# Altium PCB PCB1.PcbDoc
Units mm, origin at the board's own origin, x right, y up, seen from the top; angles counter-clockwise.
Board outline 86 x 56 mm, 2 copper layers (Top Layer, Bottom Layer), stack 1.771 mm thick; 7 components, 53 nets, 144 pads, 50 vias.
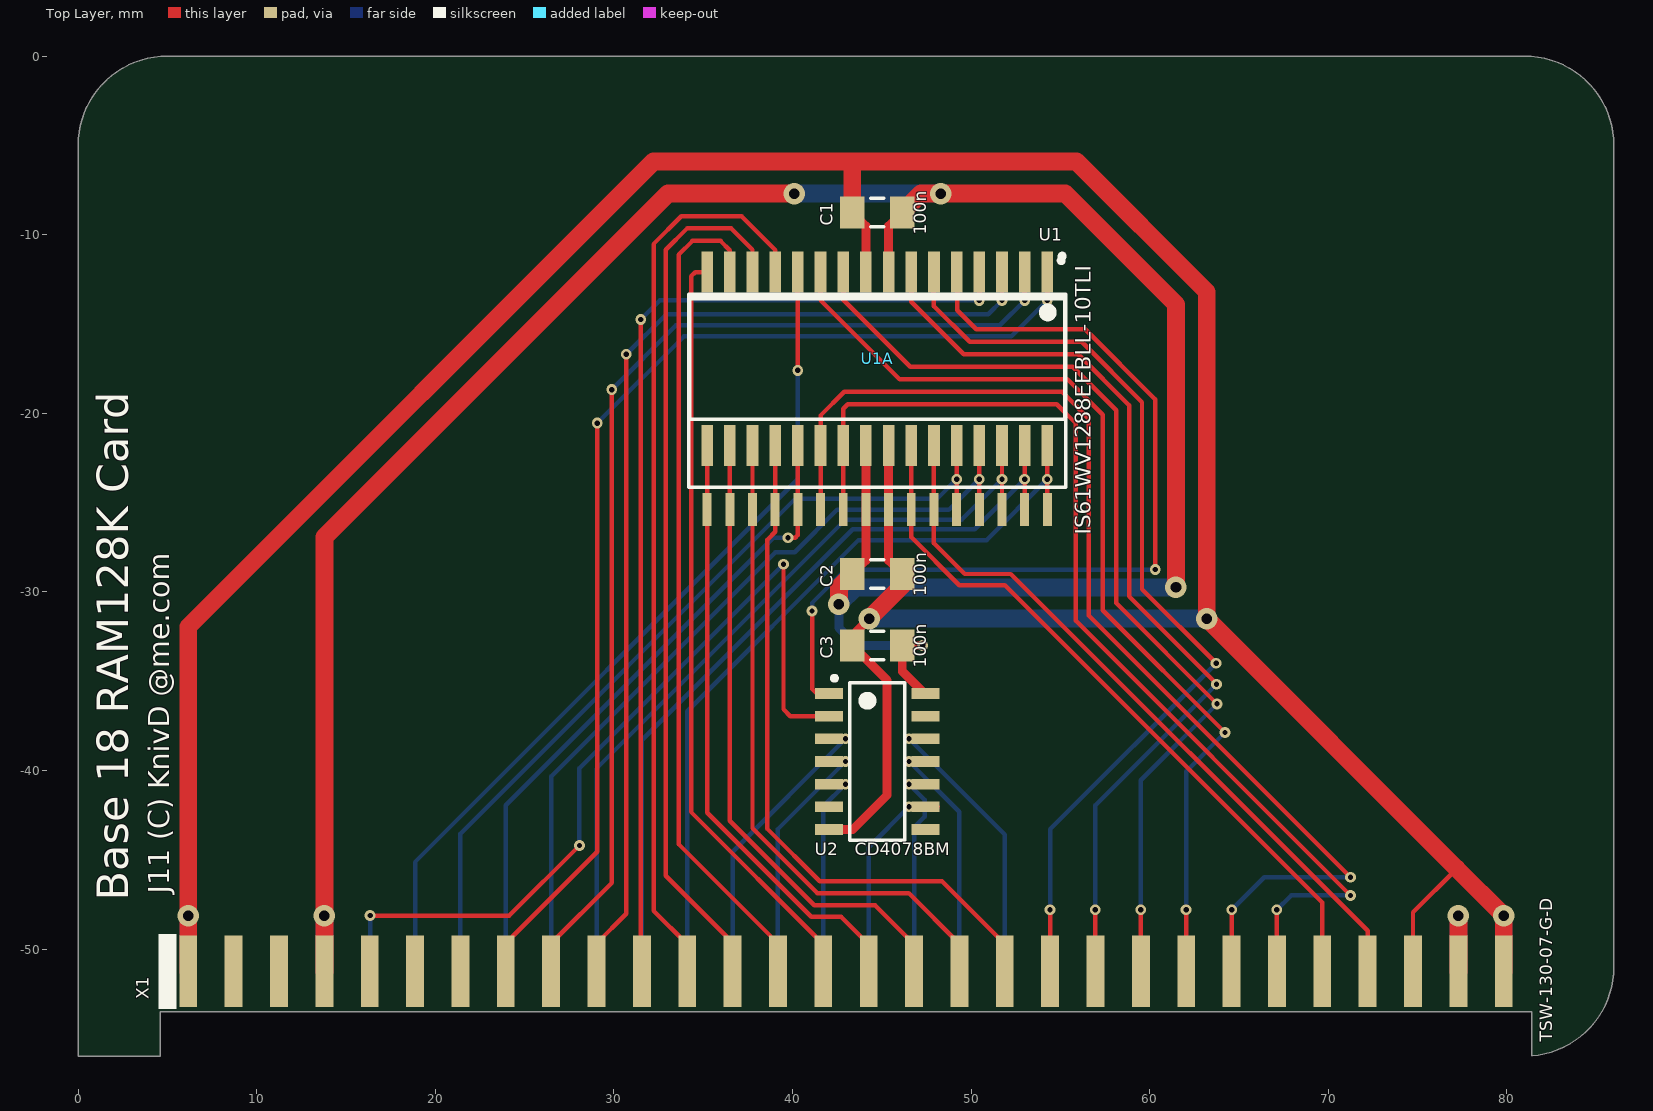
[diagram p0: Top Layer view]
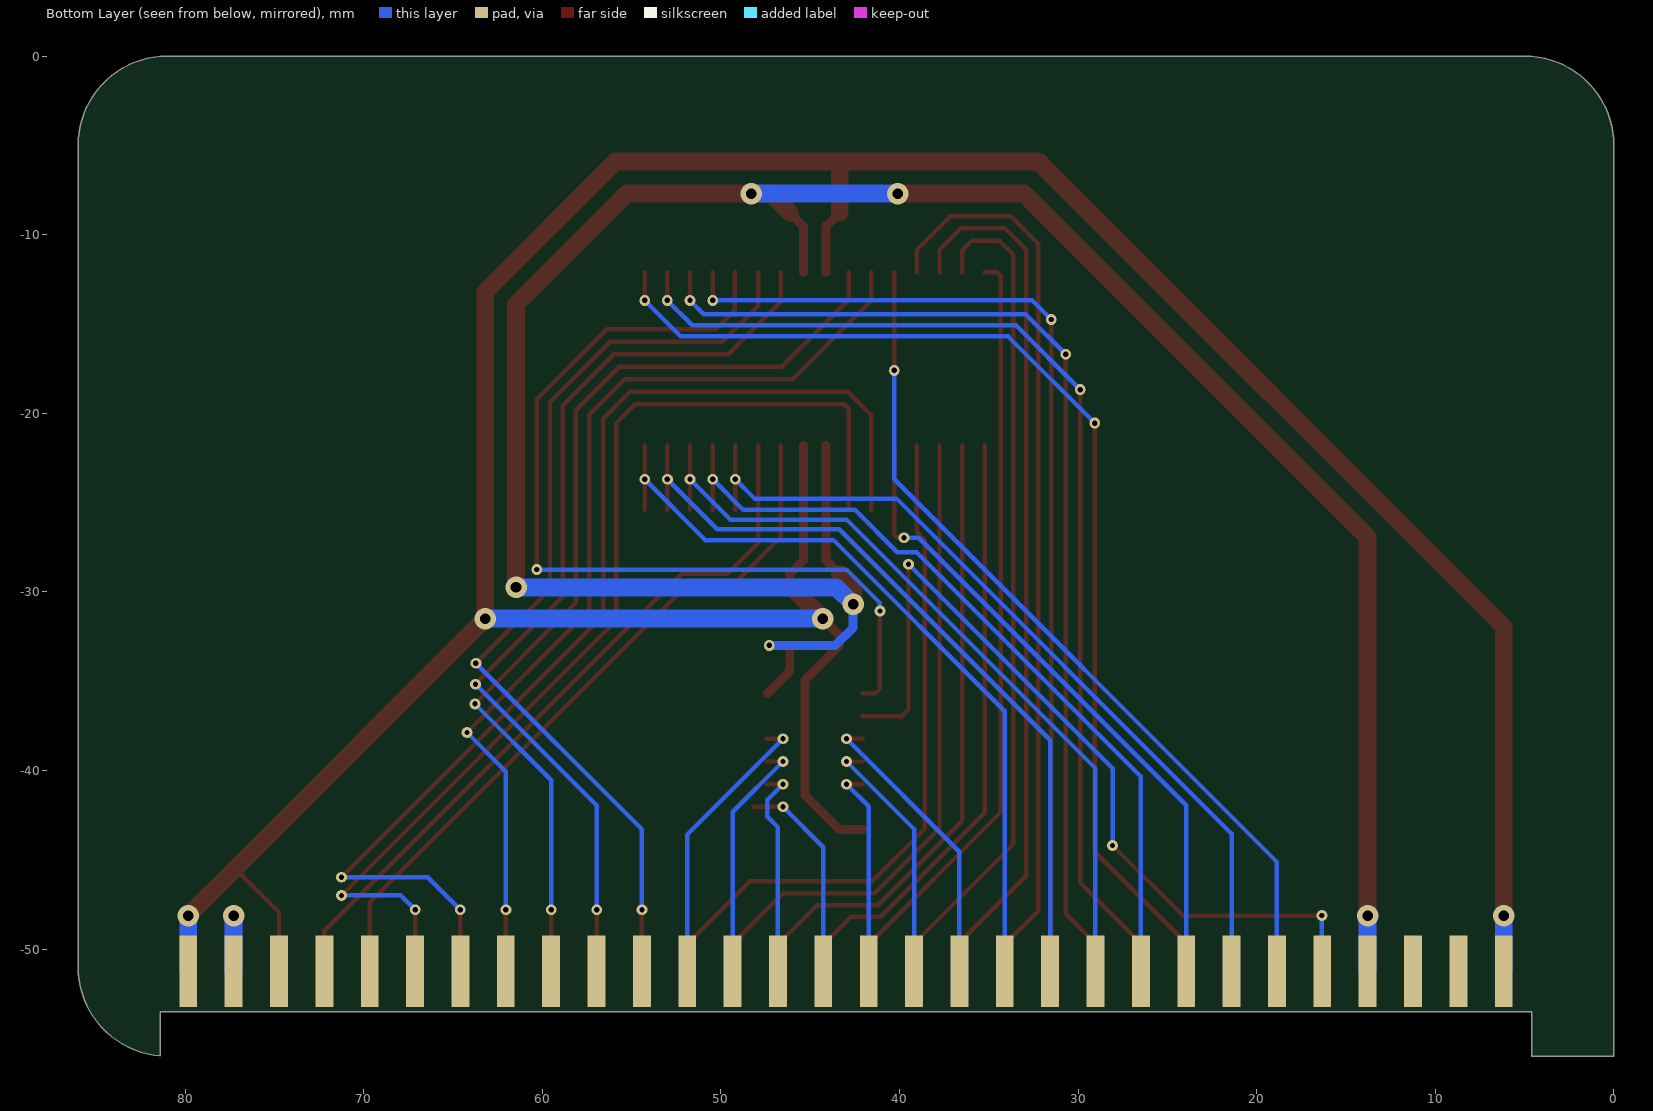
[diagram p1: Bottom Layer view, seen from below]
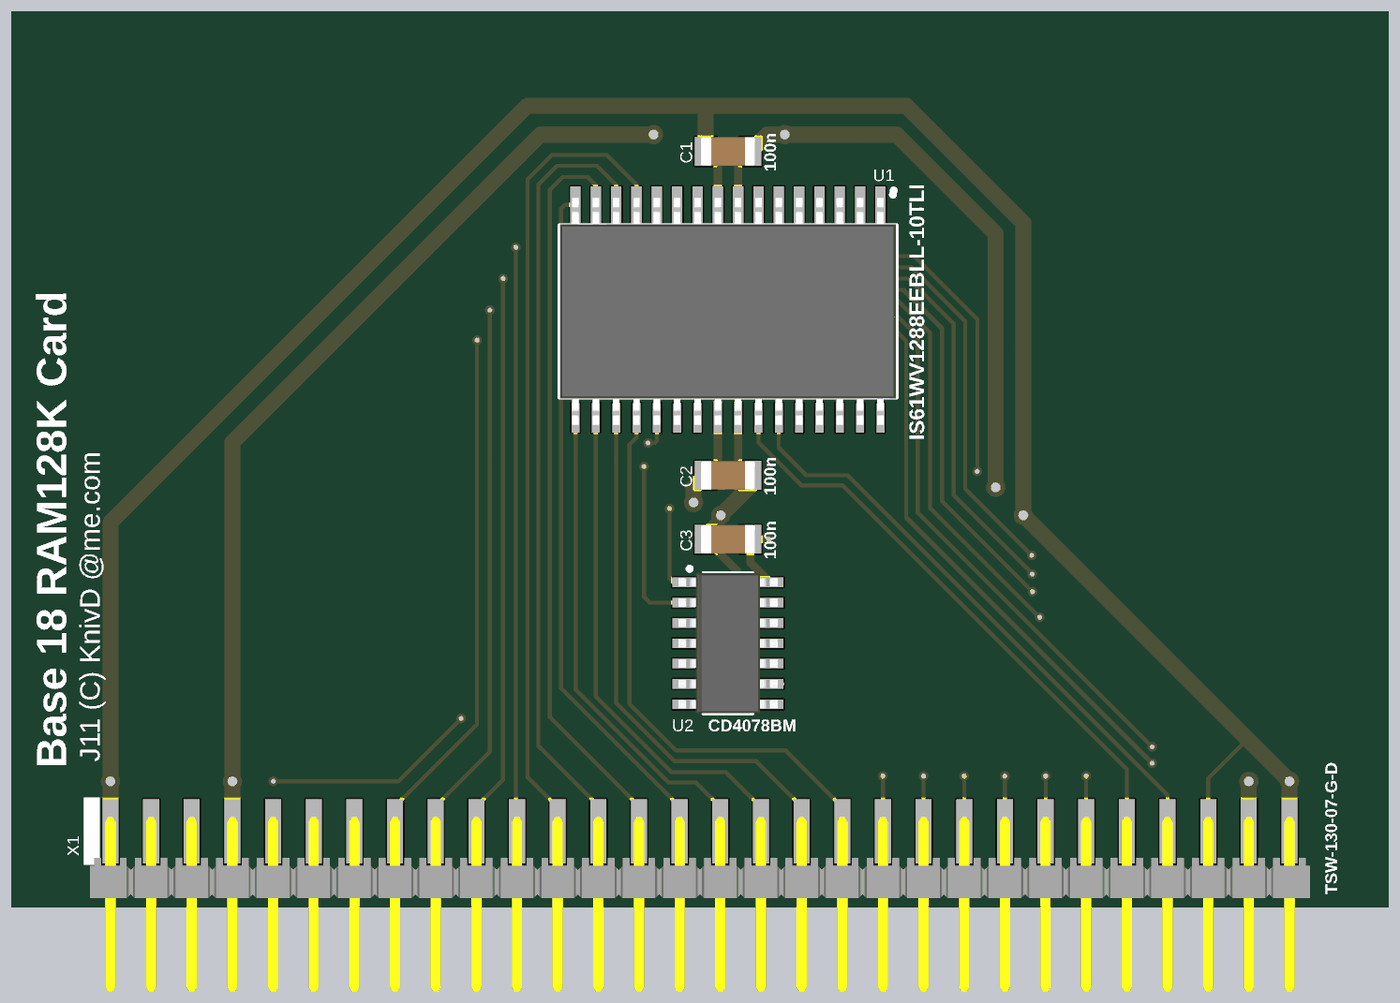
[diagram p2: 3D render of the assembled board from above, using the file's embedded part models]

## Layer stack, top to bottom
Top Solder: solder mask 0.0102, Solder Resist, Dk 3.5
Top Layer: signal copper 0.0356
Dielectric 1: core 1.7, FR-4, Dk 4.2
Bottom Layer: signal copper 0.0356
Solder Side: solder mask 0.0102, Solder Resist, Dk 3.5

## Board outline
0,-56 0,-5 cw(c5,-5) 5,0 81,0 cw(c81,-5) 86,-5 86,-51 cw(c81,-51) 81.399,-55.984 81.4,-55.984 81.4,-53.5 4.6,-53.5 4.6,-56

## Design rules (kind name [scope] priority, off if disabled: settings)
Clearance Clearance_Pour [IsRegion] p1: gap=0.3 ignorepadtopadclearanceinfootprint=TRUE
Clearance [All] p2: gap=0.2 ignorepadtopadclearanceinfootprint=TRUE
Height [All] p1: minheight=0 maxheight=100 prefheight=12.7
HoleSize [All] p1: absolutevalues=TRUE maxlimit=5 minlimit=0.025 maxpercent=80.000 minpercent=20.000
HoleToHoleClearance [All] p1: gap=0 allowstackedmicrovias=TRUE
MinimumSolderMaskSliver [All] p1: minsoldermaskwidth=0
PolygonConnect [All] p1: thpad.connectstyle=Relief thpad.reliefconductorwidth=0.25 thpad.reliefentries=4 thpad.polygonreliefangle="90 Angle" thpad.airgapwidth=0.25 smdpad.connectstyle=Relief smdpad.reliefconductorwidth=0.25 smdpad.reliefentries=4 smdpad.polygonreliefangle="90 Angle" smdpad.airgapwidth=0.25 via.connectstyle=Direct via.reliefconductorwidth=0.254 via.reliefentries=4 via.polygonreliefangle="45 Angle" via.airgapwidth=0.254
RoutingVias [All] p1: holewidth=0.3 width=0.6 viastyle="Through Hole" minholewidth=0.25 minwidth=0.5 maxholewidth=1.5 maxwidth=3
SilkToSilkClearance [All] p1: silktosilkclearance=-10
SilkToSolderMaskClearance [IsPad] p1: minsilkscreentomaskgap=-10 clearancetoexposedcopper=TRUE
SolderMaskExpansion SolderMaskExpansion_VIA [IsVia] p1: expansion=-0.3 soldermaskfromhole=TRUE
SolderMaskExpansion [All] p2: expansion=0.102
Width [All] p1: maxlimit=10 minlimit=0.2 preferedwidth=0.25
24 further rules are at their usual default settings.

## Components (designator, comment, footprint, x,y, rotation, side; value= is the part's Value field where it differs from the comment)
C1 "100n" CAPC3216X110N 44.75,-8.75 r180 top locked
C2 "100n" CAPC3216X110N 44.75,-29 r0 top locked
C3 "100n" CAPC3216X110N 44.75,-33 r180 top locked
U1 "IS61WV1288EEBLL-10TLI" SOIC127P1413X280-32N 44.75,-18.75 r270 top locked
U1A "" SOJ127P1118X368-32N 44.75,-16.95 r270 top locked
U2 "CD4078BM" SOIC127P600X175-14N 44.75,-39.5 r0 top locked
X1 "TSW-130-07-G-D" DIL60-M-EDGE 43,-50.45 r0 top locked

## Footprints (in the part's own frame and the unit in brackets; to place one, negate y for a bottom-side part, rotate by r counter-clockwise, add the part's x,y. Pads: shape width x height; smd on the part's side, far side on the other; paste and mask are expansions set on the pad)
CAPC3216X110N [mm] "Chip Capacitor, Body 3.2x1.6mm, IPC Medium Density"
  rect 1.35x1.8 smd: 1(-1.4,0) 2(1.4,0)
  silkscreen extent -0.35,-0.8 0.35,0.8, body extent -1.7,-0.9 1.7,0.9, height 1.1
DIL60-M-EDGE [mm] "DIL60 header soldered as edge connector"
  rect 1x4 smd: 1(-36.83,-0.8) 3(-34.29,-0.8) 5(-31.75,-0.8) 7(-29.21,-0.8) 9(-26.67,-0.8) 11(-24.13,-0.8) 13(-21.59,-0.8) 15(-19.05,-0.8) 17(-16.51,-0.8) 19(-13.97,-0.8) 21(-11.43,-0.8) 23(-8.89,-0.8) 25(-6.35,-0.8) 27(-3.81,-0.8) 29(-1.27,-0.8) 31(1.27,-0.8) 33(3.81,-0.8) 35(6.35,-0.8) 37(8.89,-0.8) 39(11.43,-0.8) 41(13.97,-0.8) 43(16.51,-0.8) 45(19.05,-0.8) 47(21.59,-0.8) 49(24.13,-0.8) 51(26.67,-0.8) 53(29.21,-0.8) 55(31.75,-0.8) 57(34.29,-0.8) 59(36.83,-0.8)
  rect 1x4 smd far side: 2(-36.83,-0.8) 4(-34.29,-0.8) 6(-31.75,-0.8) 8(-29.21,-0.8) 10(-26.67,-0.8) 12(-24.13,-0.8) 14(-21.59,-0.8) 16(-19.05,-0.8) 18(-16.51,-0.8) 20(-13.97,-0.8) 22(-11.43,-0.8) 24(-8.89,-0.8) 26(-6.35,-0.8) 28(-3.81,-0.8) 30(-1.27,-0.8) 32(1.27,-0.8) 34(3.81,-0.8) 36(6.35,-0.8) 38(8.89,-0.8) 40(11.43,-0.8) 42(13.97,-0.8) 44(16.51,-0.8) 46(19.05,-0.8) 48(21.59,-0.8) 50(24.13,-0.8) 52(26.67,-0.8) 54(29.21,-0.8) 56(31.75,-0.8) 58(34.29,-0.8) 60(36.83,-0.8)
  silkscreen extent -38.5,-2.9 -37.5,1.3, body extent -38.1,-10.83 38.1,0.09, height 1.64
SOIC127P600X175-14N [mm] "SOIC 14, Pitch 1.27mm - Body 4x8.75mm, IPC Medium Density"
  rect 1.55x0.6 smd: 1(-2.7,3.81) 2(-2.7,2.54) 3(-2.7,1.27) 4(-2.7,0) 5(-2.7,-1.27) 6(-2.7,-2.54) 7(-2.7,-3.81) 8(2.7,-3.81) 9(2.7,-2.54) 10(2.7,-1.27) 11(2.7,0) 12(2.7,1.27) 13(2.7,2.54) 14(2.7,3.81)
  silkscreen extent -2.52,-4.4 1.55,4.78, body extent -3.1,-4.37 3.1,4.38, height 1.75
SOIC127P1413X280-32N [mm] "SOIC, 1.27mm Pitch; 32 Pin, 10.70mm W X 21.10mm L X 2.80mm H Body, IPC Medium Density"
  rect 1.85x0.5 smd: 1(-6.65,9.525) 2(-6.65,8.255) 3(-6.65,6.985) 4(-6.65,5.715) 5(-6.65,4.445) 6(-6.65,3.175) 7(-6.65,1.905) 8(-6.65,0.635) 9(-6.65,-0.635) 10(-6.65,-1.905) 11(-6.65,-3.175) 12(-6.65,-4.445) 13(-6.65,-5.715) 14(-6.65,-6.985) 15(-6.65,-8.255) 16(-6.65,-9.525) 17(6.65,-9.525) 18(6.65,-8.255) 19(6.65,-6.985) 20(6.65,-5.715) 21(6.65,-4.445) 22(6.65,-3.175) 23(6.65,-1.905) 24(6.65,-0.635) 25(6.65,0.635) 26(6.65,1.905) 27(6.65,3.175) 28(6.65,4.445) 29(6.65,5.715) 30(6.65,6.985) 31(6.65,8.255) 32(6.65,9.525)
  silkscreen extent -7.42,-10.55 5.4,10.55, body extent -7.09,-10.5 7.09,10.5, height 3
SOJ127P1118X368-32N [mm] "SO J-Lead, 1.27mm, Pitch; 32 Pin, 10.16mm W X 20.95mm L X 3.68mm H body, IPC Medium Density"
  rect 2.3x0.65 smd: 1(-4.85,9.525) 2(-4.85,8.255) 3(-4.85,6.985) 4(-4.85,5.715) 5(-4.85,4.445) 6(-4.85,3.175) 7(-4.85,1.905) 8(-4.85,0.635) 9(-4.85,-0.635) 10(-4.85,-1.905) 11(-4.85,-3.175) 12(-4.85,-4.445) 13(-4.85,-5.715) 14(-4.85,-6.985) 15(-4.85,-8.255) 16(-4.85,-9.525) 17(4.85,-9.525) 18(4.85,-8.255) 19(4.85,-6.985) 20(4.85,-5.715) 21(4.85,-4.445) 22(4.85,-3.175) 23(4.85,-1.905) 24(4.85,-0.635) 25(4.85,0.635) 26(4.85,1.905) 27(4.85,3.175) 28(4.85,4.445) 29(4.85,5.715) 30(4.85,6.985) 31(4.85,8.255) 32(4.85,9.525)
  silkscreen extent -5.87,-10.5 3.37,10.5

## Part data
C1 C2 C3: library part Capacitor, "Capacitor"
U1: library part IS63LV1024L, "128k x8 high-speed CMOS static RAM 3.3V", Manufacturer=ISSI
U1A: library part IS63LV1024L, "128k x8 high-speed CMOS static RAM 3.3V"
U2: library part CD4078BE, "8-Input NOR Gate", Case=DIP14-300, Manufacturer="TEXAS INSTRUMENTS", Author="CERN DEM JLC", ComponentHeight=5.08mm, Component Type=Standard, CreateDate=21/01/2008, Device=CD4078BE, HelpURL=\\cern.ch\dfs\Applications\Altium\Datasheets\CD4078BE.pdf, LatestRevisionDate=13/03/2008, Manufacturer Part Number=CD4078BE, Mounted=Yes, PackageDescription="DIP; 14 Leads; Row Spacing 7.62 mm; Pitch 2.54 mm", Part Description="8-Input NOR Gate", Part Number=CD4078BE, Pin Count=12, SMD=No, Socket=Yes, Table="Standard Logic"
X1: library part "Connector 2x30", "Dual row, 60-way connector"

## Via types
v1: diameter 0.6, hole 0.3, Top Layer to Bottom Layer, tented both sides, 40 vias
v2: diameter 1.2, hole 0.6, Top Layer to Bottom Layer, tented both sides, 10 vias

## Nets (pads, with @x,y where several pads share a name; then routed paths per layer and width w, separated by ;. In a path a pad name is that pad's centre, name@x,y a point inside that pad or via, vN(x,y) a via of type N, cw(c..) or ccw(c..) an arc to the next point about the centre after c; other vN are vias at no path point)
+3V3: C1.1 C2.1 C3.1 U1.8 U1.24 U1A.8 U1A.24 U2.14 X1.7 X1.8 | length 147.3
  Top Layer w0.5: C2.1 44.115,-28.235 U1.24 U1A.24 ; U1A.8 45.385,-9.515 C1.1 ; v1(47.3,-33) C3.1 46.15,-34.45 U2.14@47.39,-35.69
  Top Layer w1: X1.7 v2(13.79,-48.13) 13.79,-26.935 33.025,-7.7 v2(40.1,-7.7) ; v2(42.6,-30.7) 42.6,-29.75 C2.1 ; C1.1 47.2,-7.7 v2(48.3,-7.7) 55.275,-7.7 61.475,-13.9 v2(61.475,-29.75)
  Bottom Layer w0.5: v2(42.6,-30.7) 42.6,-32 43.6,-33 v1(47.3,-33)
  Bottom Layer w1: X1.8 v2(13.79,-48.13) ; v2(40.1,-7.7) v2(48.3,-7.7) ; v2(42.6,-30.7) 43.55,-29.75 v2(61.475,-29.75)
+Vin: X1.57 X1.58 | length 6.2
  Top Layer w1: X1.57 v2(77.29,-48.13)
  Bottom Layer w1: X1.58 v2(77.29,-48.13)
A00: U1.1 U1A.1 X1.15 | length 62.4
  Top Layer w0.25: X1.15 23.95,-49.675 29.075,-44.55 v1(29.075,-20.55) ; v1(54.275,-13.68) U1A.1
  Bottom Layer w0.25: v1(29.075,-20.55) 33.925,-15.7 52.255,-15.7 v1(54.275,-13.68)
A01: U1.2 U1A.2 X1.17 | length 60.8
  Top Layer w0.25: X1.17 26.49,-49.685 29.875,-46.3 v1(29.875,-18.675) ; v1(53.005,-13.68) U1A.2
  Bottom Layer w0.25: v1(29.875,-18.675) 33.475,-15.075 51.61,-15.075 v1(53.005,-13.68)
A02: U1.3 U1A.3 X1.19 | length 59.1
  Top Layer w0.25: X1.19 29.03,-49.695 30.7,-48.025 v1(30.7,-16.7) ; v1(51.735,-13.68) U1A.3
  Bottom Layer w0.25: v1(30.7,-16.7) 32.95,-14.45 50.965,-14.45 v1(51.735,-13.68)
A03: U1.4 U1A.4 X1.21 | length 57.5
  Top Layer w0.25: v1(31.5,-14.75) 31.5,-51.18 X1.21 ; v1(50.465,-13.68) U1A.4
  Bottom Layer w0.25: v1(31.5,-14.75) 32.57,-13.68 v1(50.465,-13.68)
A04: U1.13 U1A.13 X1.23 | length 51
  Top Layer w0.25: X1.23 34.11,-49.735 32.225,-47.85 32.225,-10.525 33.775,-8.975 37.15,-8.975 39.035,-10.86 U1A.13
A05: U1.14 U1A.14 X1.25 | length 49.1
  Top Layer w0.25: X1.25 36.65,-49.65 32.9,-45.9 32.9,-10.85 34.1,-9.65 36.575,-9.65 37.765,-10.84 U1A.14
A06: U1.15 U1A.15 X1.27 | length 47.1
  Top Layer w0.25: U1A.15 36.495,-10.87 35.975,-10.35 34.4,-10.35 33.625,-11.125 33.625,-44.125 39.19,-49.69 X1.27
A07: U1.16 U1A.16 X1.29 | length 43
  Top Layer w0.25: U1A.16 34.55,-12.1 34.325,-12.325 34.325,-42.325 41.73,-49.73 X1.29
A08: U1.17 U1A.17 X1.31 | length 34.2
  Top Layer w0.25: U1A.17 U1.17 35.225,-42.375 41.05,-48.2 42.725,-48.2 44.27,-49.745 X1.31
A09: U1.18 U1A.18 X1.33 | length 35.7
  Top Layer w0.25: U1A.18 U1.18 36.495,-42.82 41.225,-47.55 44.625,-47.55 46.81,-49.735 X1.33
A10: U1.19 U1A.19 X1.35 | length 37.3
  Top Layer w0.25: U1A.19 U1.19 37.765,-43.24 41.4,-46.875 46.525,-46.875 49.35,-49.7 X1.35
A11: U1.20 U1A.20 X1.37 | length 39.1
  Top Layer w0.25: U1A.20 U1.20 39.035,-26.64 38.6,-27.075 38.6,-43.275 41.525,-46.2 48.375,-46.2 51.89,-49.715 X1.37
A12: U1.21 U1A.21 X1.16 | length 37
  Top Layer w0.25: v1(39.75,-26.975) 40.15,-26.975 40.305,-26.82 U1.21 ; U1.21@40.275,-25.37 U1.21 ; U1A.21 U1.21
  Bottom Layer w0.25: X1.16 23.95,-41.95 38.925,-26.975 v1(39.75,-26.975)
A13: U1.29 U1A.29 X1.18 | length 45.4
  Top Layer w0.25: U1.29 v1(50.465,-23.7) U1A.29
  Bottom Layer w0.25: X1.18 26.49,-40.335 39.05,-27.775 40.125,-27.775 42.5,-25.4 48.765,-25.4 v1(50.465,-23.7)
A14: U1.30 U1A.30 X1.20 | length 44.4
  Top Layer w0.25: U1.30 v1(51.735,-23.7) U1A.30
  Bottom Layer w0.25: X1.20 29.03,-39.895 42.975,-25.95 49.485,-25.95 v1(51.735,-23.7)
A15: U1.31 U1A.31 X1.22 | length 44
  Top Layer w0.25: U1.31 U1A.31
  Bottom Layer w0.25: X1.22 31.57,-38.305 43.375,-26.5 50.205,-26.5 v1@53.005,-23.7
  other v1: 53,-23.7
A16: U1.32 U1A.32 X1.24 | length 43.7
  Top Layer w0.25: U1.32 v1(54.275,-23.7) U1A.32
  Bottom Layer w0.25: X1.24 34.11,-36.69 43.7,-27.1 50.875,-27.1 v1(54.275,-23.7)
A17: U2.3 X1.26 | length 16.6
  Top Layer w0.25: U2.3 v1(42.97,-38.23)
  Bottom Layer w0.25: X1.26 36.65,-44.55 v1(42.97,-38.23)
A18: U2.4 X1.28 | length 14.2
  Top Layer w0.25: U2.4 v1(42.97,-39.5)
  Bottom Layer w0.25: X1.28 39.19,-43.28 v1(42.97,-39.5)
A19: U2.5 X1.30 | length 11.9
  Top Layer w0.25: U2.5 v1(42.97,-40.77)
  Bottom Layer w0.25: X1.30 41.73,-42.01 v1(42.97,-40.77)
A20: U2.9 X1.32 | length 11.8
  Top Layer w0.25: v1(46.53,-42.04) U2.9@48.15,-42.04
  Bottom Layer w0.25: X1.32 44.27,-44.3 v1(46.53,-42.04)
A21: U2.10 X1.34 | length 12
  Top Layer w0.25: v1(46.53,-40.77) U2.10
  Bottom Layer w0.25: v1(46.53,-40.77) 47.4,-41.64 47.4,-42.6 46.81,-43.19 X1.34
A22: U2.11 X1.36 | length 13.8
  Top Layer w0.25: v1(46.53,-39.5) U2.11
  Bottom Layer w0.25: v1(46.53,-39.5) 49.35,-42.32 X1.36
A23: U2.12 X1.38 | length 16.2
  Top Layer w0.25: v1(46.53,-38.23) U2.12
  Bottom Layer w0.25: v1(46.53,-38.23) 51.89,-43.59 X1.38
BUS#: U2.2 X1.10 | length 47.8
  Top Layer w0.25: v1(16.35,-48.125) 24.15,-48.125 v1(28.075,-44.2) ; v1(39.5,-28.45) 39.5,-36.575 39.885,-36.96 U2.2
  Bottom Layer w0.25: X1.10 16.35,-51.23 v1(16.35,-48.125) ; v1(28.075,-44.2) 28.075,-39.875 v1(39.5,-28.45)
CE#: U1.5 U1A.5 U2.1 | length 50.7
  Top Layer w0.25: v1(41.1,-31.075) 41.1,-35.44 41.35,-35.69 U2.1 ; U1A.5 49.225,-12.13 49.225,-14.225 50.3,-15.3 56.4,-15.3 60.325,-19.225 v1(60.325,-28.75)
  Bottom Layer w0.25: v1(41.1,-31.075) 41.1,-30.625 42.975,-28.75 v1(60.325,-28.75)
DB0: U1.6 U1A.6 X1.39 | length 53.2
  Top Layer w0.25: U1A.6 47.925,-14 49.925,-16 56.2,-16 59.575,-19.375 59.575,-29.85 v1(63.725,-34) ; X1.39@54.425,-51.245 v1(54.425,-47.8)
  Bottom Layer w0.25: v1(54.425,-47.8) 54.425,-43.3 v1(63.725,-34)
DB1: U1.7 U1A.7 X1.41 | length 52.8
  Top Layer w0.25: U1A.7 46.655,-13.755 49.6,-16.7 56,-16.7 58.85,-19.55 58.85,-30.25 63.75,-35.15 v1(63.75,-35.175) ; X1.41@56.965,-51.245 v1(56.965,-47.8)
  Bottom Layer w0.25: v1(56.965,-47.8) 56.965,-41.96 v1(63.75,-35.175)
DB2: U1.10 U1A.10 X1.43 | length 54.9
  Top Layer w0.25: U1A.10 42.845,-13.645 46.6,-17.4 55.7,-17.4 58.125,-19.825 58.125,-30.625 v1(63.775,-36.275) ; X1.43@59.505,-51.245 v1(59.505,-47.8)
  Bottom Layer w0.25: v1(59.505,-47.8) 59.505,-40.545 v1(63.775,-36.275)
DB3: U1.11 U1A.11 X1.45 | length 54.9
  Top Layer w0.25: U1A.11 41.575,-13.675 46,-18.1 55.4,-18.1 57.375,-20.075 57.375,-31.025 v1(64.225,-37.875) ; X1.45@62.045,-51.245 v1(62.045,-47.8)
  Bottom Layer w0.25: v1(62.045,-47.8) 62.045,-40.055 v1(64.225,-37.875)
DB4: U1.22 U1A.22 X1.47 | length 64.1
  Top Layer w0.25: U1.22 U1A.22 41.575,-20.125 42.9,-18.8 55.1,-18.8 56.6,-20.3 56.6,-31.325 v1(71.25,-45.975) ; X1.47 64.6,-51.24 v1(64.6,-47.8)
  Bottom Layer w0.25: v1(64.6,-47.8) 66.425,-45.975 v1(71.25,-45.975)
DB5: U1.23 U1A.23 X1.49 | length 59.9
  Top Layer w0.25: U1.23 U1A.23 42.845,-19.755 43.1,-19.5 54.8,-19.5 55.875,-20.575 55.875,-31.625 v1(71.25,-47) ; v1(67.125,-47.8) 67.125,-51.245 X1.49
  Bottom Layer w0.25: v1(67.125,-47.8) 67.925,-47 v1(71.25,-47)
DB6: U1.26 U1A.26 X1.51 | length 40.5
  Top Layer w0.25: U1A.26 U1.26 46.655,-26.93 49.35,-29.625 51.9,-29.625 69.67,-47.395 X1.51
DB7: U1.27 U1A.27 X1.53 | length 41
  Top Layer w0.25: U1A.27 U1.27 47.925,-27.275 49.65,-29 52.225,-29 72.21,-48.985 X1.53
GND: C1.2 C2.2 C3.2 U1.9 U1.25 U1A.9 U1A.25 U2.7 X1.1 X1.2 X1.55 X1.59 X1.60 | length 199.4
  Top Layer w0.25: X1.55 74.75,-47.95 77.2,-45.5
  Top Layer w0.5: U2.7 43.365,-43.31 45.3,-41.375 45.3,-34.95 C3.2 43.35,-32.45 v2(44.3,-31.5) ; C1.2 44.115,-9.515 U1A.9 ; U1A.25 U1.25 45.385,-28.235 C2.2 C2.2@46.15,-29.65
  Top Layer w1: X1.1 v2(6.17,-48.13) 6.17,-31.955 32.225,-5.9 55.9,-5.9 63.2,-13.2 v2(63.2,-31.5) 77.2,-45.5 v2(79.83,-48.13) X1.59 ; C1.2 43.35,-5.9 ; v2(44.3,-31.5) C2.2@46.15,-29.65
  Bottom Layer w1: X1.2 v2(6.17,-48.13) ; v2(44.3,-31.5) v2(63.2,-31.5) ; X1.60 v2(79.83,-48.13)
INT0#: X1.9
INT1#: X1.11
INT2#: X1.13
MCLR#: X1.5
MISO: X1.48
MOSI: X1.46
RD#: U1.28 U1A.28 X1.14 | length 47.3
  Top Layer w0.25: U1.28 v1(49.195,-23.7) U1A.28
  Bottom Layer w0.25: X1.14 21.41,-43.54 40.175,-24.775 48.12,-24.775 v1(49.195,-23.7)
RESET#: X1.6
RXD: X1.42
SCLK: X1.44
SEL0#: X1.50
SEL1#: X1.52
SEL2#: X1.54
SEL3#: X1.56
TXD: X1.40
WR#: U1.12 U1A.12 X1.12 | length 48
  Top Layer w0.25: v1(40.3,-17.6) 40.3,-12.105 U1A.12
  Bottom Layer w0.25: X1.12 18.87,-45.13 40.3,-23.7 v1(40.3,-17.6)
pads on no net: U2.6 U2.8 U2.13 X1.3 X1.4

## Silkscreen, mask and mechanical layers (free items; w line width, h text height)
Top Overlay:
  text "J11 (C) KnivD @me.com" at 5.5,-46.9 h2 r90
  text "Base 18 RAM128K Card" at 3.4,-47.3 h3 r90
Mechanical 1:
  lines w0.4: 81.399,-55.984 ccw(c81,-51) 86,-51 86,-5 ccw(c81,-5) 81,0 5,0 ccw(c5,-5) 0,-5 0,-56 4.6,-56 4.6,-53.5 81.4,-53.5 81.4,-55.984
Drill Drawing:
  text "PCB parameters: HASL, FR-4, 1.8mm / 1oz, green soldermask, white overlay" at 7.5,-69 h2